# EAGLE board io_top (EAGLE 9.6.2)
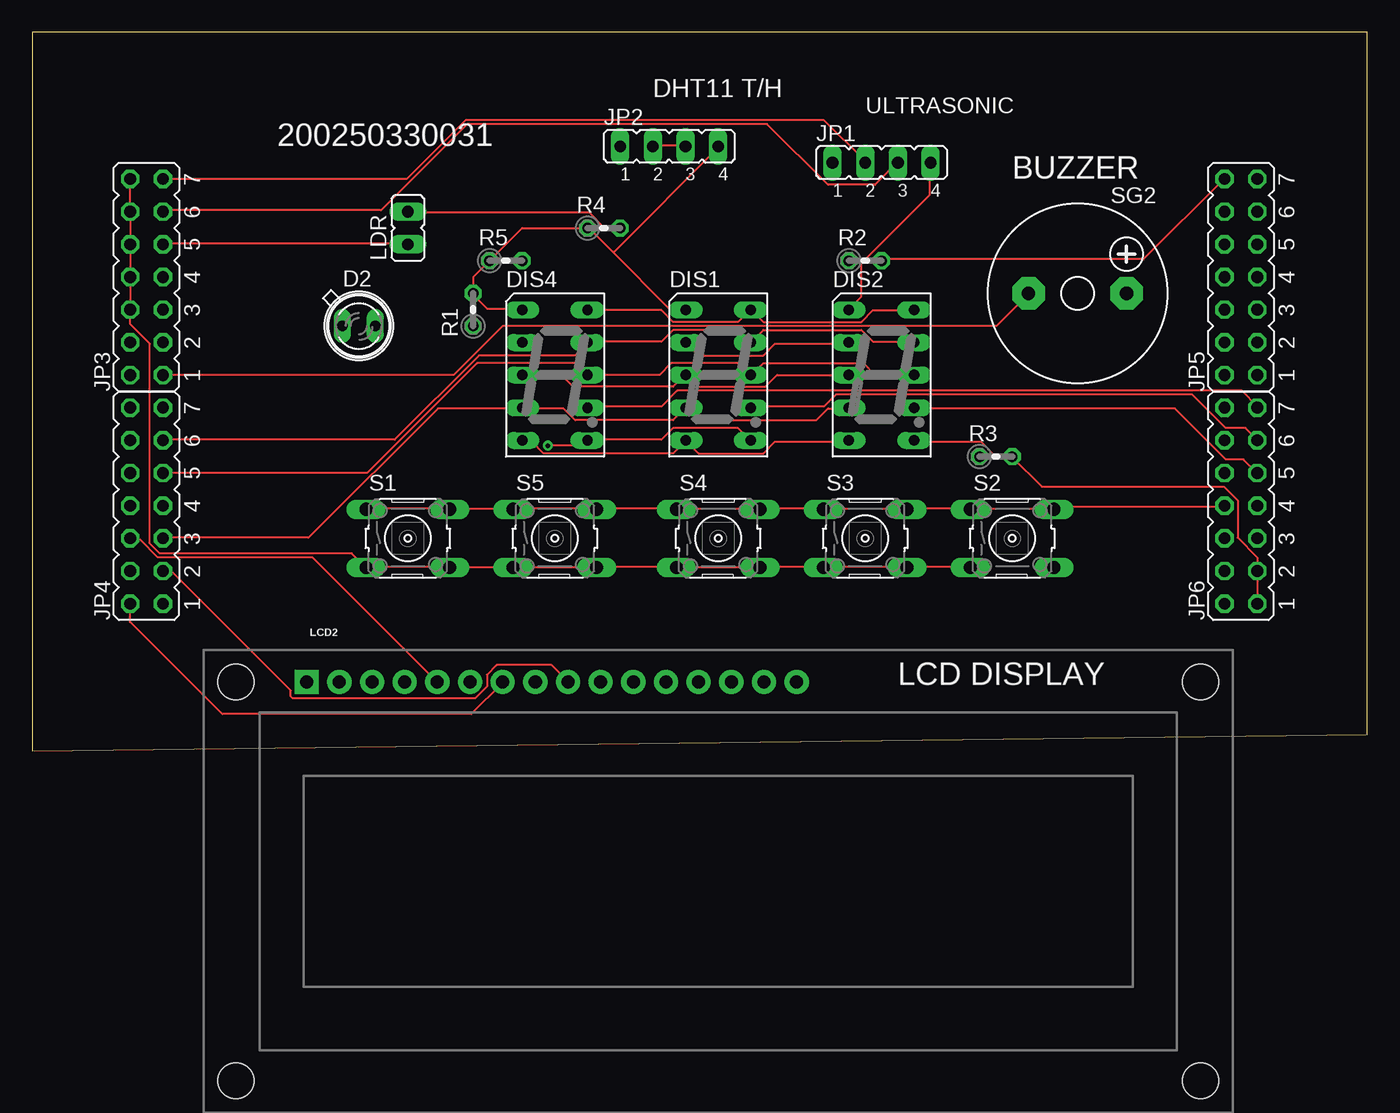
[diagram p0: board, top side]
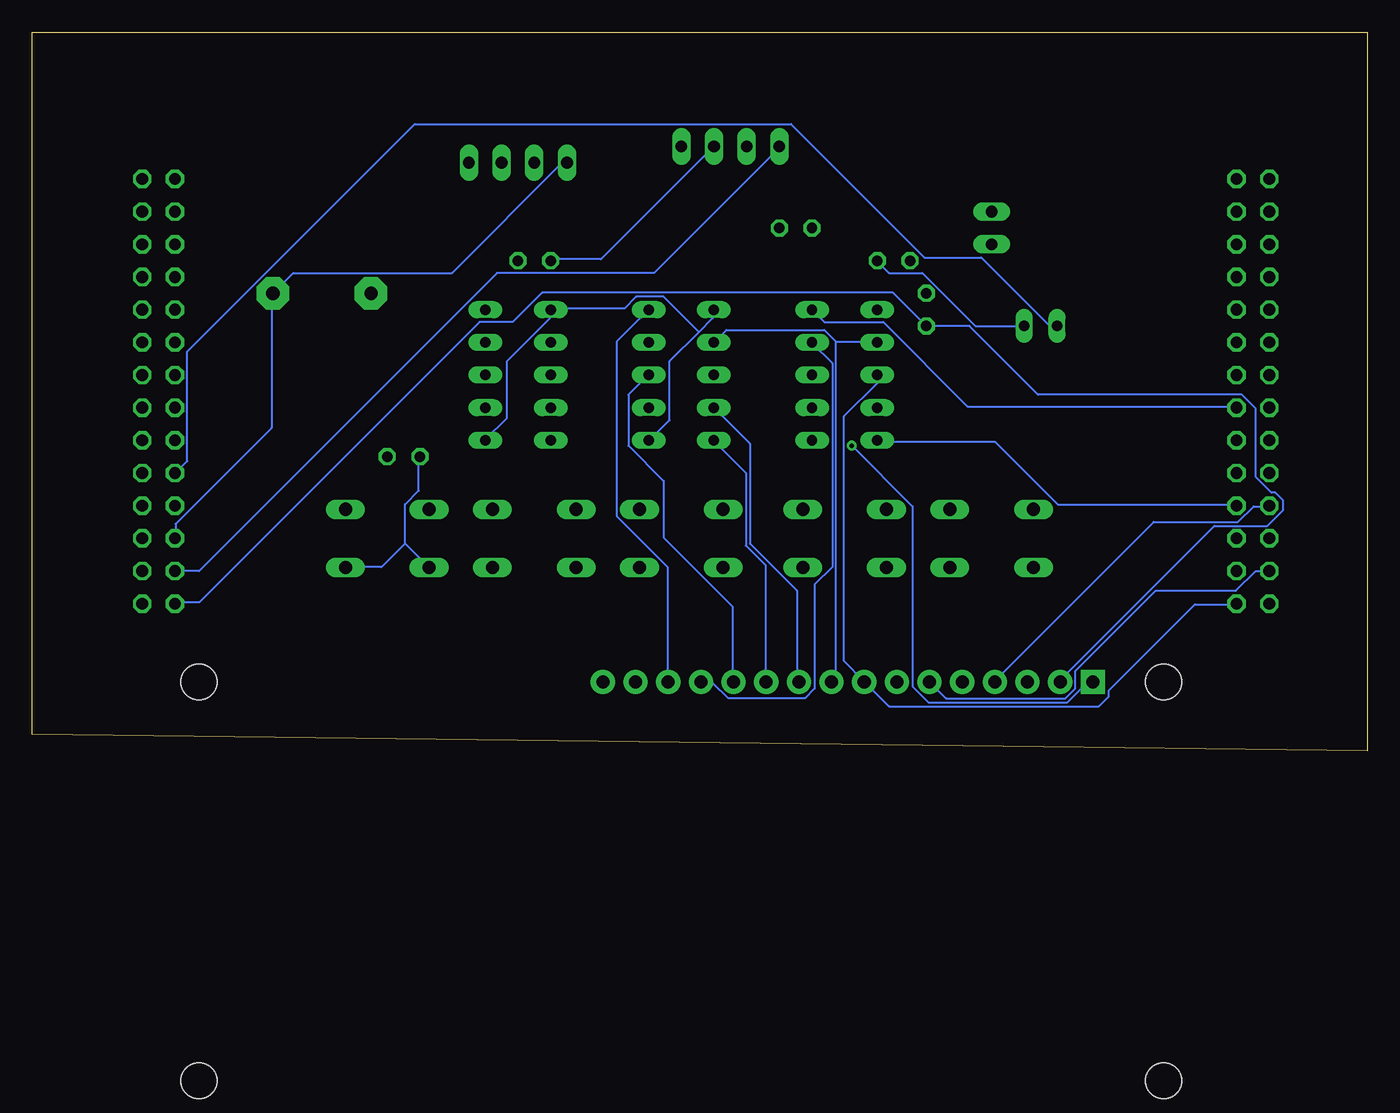
[diagram p1: board, bottom side, seen from below]

Size 103.81 x 55.87 mm. Coordinates in mm from the lower left corner, seen from the top.
Outline: 0,0 103.81,1.27 103.81,55.87 0,55.87 0,0
Copper layers (1*16): Top 0.035mm / dielectric 1.5mm / Bottom 0.035mm
Design rules "default": minimum track width 6mil, minimum drill 0.35mm, track to track 6mil, track to pad 6mil, pad to pad 6mil, via to via 6mil, smd to smd 6mil, copper to edge 40mil, drill to drill 6mil, minimum pad ring 10mil, minimum via ring 8mil, stop-mask expansion 4mil, vias tented up to drill 0mil, thermal gap 10mil

## Footprints (pad centres in the part's own frame; a part is rotated, then mirrored left to right if it is on the bottom)
SFH482 = drill 0.813 long: A -1.27,0; K 1.27,0
HDSP-A = drill 0.813 long: 1 -2.54,5.08; 2 -2.54,2.54; 3 -2.54,0; 4 -2.54,-2.54; 5 -2.54,-5.08; 6 2.54,-5.08; 7 2.54,-2.54; 8 2.54,0; 9 2.54,2.54; 10 2.54,5.08
JP4 = drill 0.914 long: 1 -3.81,0; 2 -1.27,0; 3 1.27,0; 4 3.81,0
JP7Q = drill 0.914 octagon: 1 -7.62,-1.27; 2 -7.62,1.27; 3 -5.08,-1.27; 4 -5.08,1.27; 5 -2.54,-1.27; 6 -2.54,1.27; 7 0,-1.27; 8 0,1.27; 9 2.54,-1.27; 10 2.54,1.27; 11 5.08,-1.27; 12 5.08,1.27; 13 7.62,-1.27; 14 7.62,1.27
LCD-16X2_NOSILK = drill 1.016 pad 1.88 square: 1 -32,15.5 | drill 1.016 pad 1.88: 2 -29.46,15.5; 3 -26.92,15.5; 4 -24.38,15.5; 5 -21.84,15.5; 6 -19.3,15.5; 7 -16.76,15.5; 8 -14.22,15.5; 9 -11.68,15.5; 10 -9.14,15.5; 11 -6.6,15.5; 12 -4.06,15.5; 13 -1.52,15.5; 14 1.02,15.5; 15 3.56,15.5; 16 6.1,15.5 | hole 2.8: -37.5,15.5; -37.5,-15.5; 37.5,15.5; 37.5,-15.5
JP1 = drill 0.914 long: 1 0,-1.27; 2 0,1.27
0204V = drill 0.813 octagon: 1 -1.27,0; 2 1.27,0
B3F-10XX = drill 1.016 long: 1 -3.251,2.261; 2 3.251,2.261; 3 -3.251,-2.261; 4 3.251,-2.261
F/CM12P = drill 1.016 pad 2.54 octagon: + 3.81,0; - -3.81,0

## Placement (x,y rotation side)
D2  SFH482  [SFH482]  25.4,33.02 0 top
DIS1  HD-A103  [HDSP-A]  53.34,29.21 0 top
DIS2  HD-A103  [HDSP-A]  66.04,29.21 0 top
DIS4  HD-A103  [HDSP-A]  40.64,29.21 0 top
JP1  [JP4]  66.04,45.72 0 top
JP2  [JP4]  49.53,46.99 0 top
JP3  [JP7Q]  8.89,36.83 90 top
JP4  [JP7Q]  8.89,19.05 90 top
JP5  [JP7Q]  93.98,36.83 90 top
JP6  [JP7Q]  93.98,19.05 90 top
LCD2  LCD-16X2NOSILK  [LCD-16X2_NOSILK]  53.34,-10.16 0 top
LDR  [JP1]  29.21,40.64 0 top
R1  [0204V]  34.29,34.29 90 top
R2  [0204V]  64.77,38.1 0 top
R3  [0204V]  74.93,22.86 0 top
R4  [0204V]  44.45,40.64 0 top
R5  [0204V]  36.83,38.1 0 top
S1  [B3F-10XX]  29.21,16.51 0 top
S2  [B3F-10XX]  76.2,16.51 0 top
S3  [B3F-10XX]  64.77,16.51 0 top
S4  [B3F-10XX]  53.34,16.51 0 top
S5  [B3F-10XX]  40.64,16.51 0 top
SG2  F/CM12P  [F/CM12P]  81.28,35.56 0 top

## Library data of the parts
D2 = led
DIS1 DIS2 DIS4 = display-hp; OC_FARNELL: unknown; OC_NEWARK: unknown
JP1-JP6 LDR = jumper
LCD2 = SparkFun-Displays; SF_ID: LCD-00255
R1-R5 = rcl; SPICEPREFIX: R
S1-S5 = switch-omron; MPN: B3F-1000; OC_FARNELL: 176432; OC_NEWARK: 36M3542
SG2 = buzzer; OC_FARNELL: unknown; OC_NEWARK: unknown

## Nets
5V: JP1.1 JP6.6 SG2.+
A: LCD2.15
GND: DIS1.1 DIS1.6 DIS2.1 DIS2.6 DIS4.1 DIS4.6 JP1.4 JP2.4 JP6.1 JP6.3 LCD2.1 R1.2 R3.2 R4.1 R5.1
K: LCD2.16
N$1: JP3.1 SG2.-
N$2: JP2.2 JP2.3 R2.1
N$3: DIS1.3 DIS2.3 DIS4.3 JP4.1 LCD2.8
N$4: DIS1.2 DIS2.2 DIS4.2 JP4.3 LCD2.9
N$5: DIS1.4 DIS2.4 DIS4.4 JP4.5 LCD2.10
N$6: DIS1.5 DIS2.5 DIS4.5 JP4.7 LCD2.11
N$7: DIS1.8 DIS2.8 DIS4.8 JP4.9 LCD2.12
N$8: DIS1.9 DIS2.9 DIS4.9 JP4.11 LCD2.13
N$9: DIS1.10 DIS2.10 DIS4.10 JP4.13 LCD2.14
N$10: JP4.2 LCD2.7
N$11: JP6.2 LCD2.2 R1.1
N$12: JP1.3 JP3.11
N$13: JP4.4 LCD2.6
N$14: JP4.6 LCD2.5
N$15: JP4.8 LCD2.4
N$16: JP3.6 JP3.8 JP3.10 JP3.12 JP3.14 R3.1 S1.3 S1.4 S2.3 S2.4 S3.3 S3.4 S4.3 S4.4 S5.3 S5.4
N$17: JP1.2 JP3.13
N$18: JP5.14 R2.2
N$19: JP3.9 LDR.1
N$20: LDR.2 R4.2
N$21: JP2.1 JP6.4
N$22: JP6.8 S1.1 S1.2 S2.1 S2.2 S3.1 S3.2 S4.1 S4.2 S5.1 S5.2
N$23: D2.K R5.2
N$24: D2.A JP6.10
N$25: DIS4.7 JP6.13
N$26: DIS1.7 JP6.11
N$27: DIS2.7 JP6.9

## Tracks (layer width: path | path; a pad name or v marks a point on that pad's centre or on a via)
5V
  Bottom 0.152: JP6.6 92.66,16.56 92.66,17.63 85.19,25.09 85.19,35.46 SG2.+ 83.52,37.13 71.17,37.13 62.64,45.67 62.33,45.67 JP1.1
GND  (via drill 0.35)
  Top 0.152: JP6.1 JP6.3 95.25,15.04 93.73,16.56 93.73,19.46 92.66,20.52 78.49,20.52 76.2,22.81 R3.2 76.2,22.96 74.83,22.96 73.76,24.03 68.58,24.03 DIS2.6 | JP1.4 69.8,45.67 69.8,43.23 64.47,37.9 64.47,35.31 63.55,34.39 DIS2.1 | DIS4.1 38.1,34.39 35.36,34.39 34.29,35.46 R1.2 34.29,36.83 R5.1 38.1,40.64 R4.1 43.28,40.64 45.11,38.81 | 45.11,38.81 49.53,34.39 50.75,34.39 DIS1.1 | 45.11,38.81 45.26,38.81 53.34,46.89 JP2.4 | DIS1.6 55.78,24.18 54.86,25.09 49.84,25.09 48.92,24.18 43.28,24.18 DIS4.6 43.13,24.03 42.82,23.72 v40.08,23.72
  Bottom 0.152: DIS2.6 68.58,24.18 66.9,25.86 66.9,30.28 63.55,33.63 63.55,34.24 DIS2.1 63.4,34.39 57.76,34.39 56.84,35.31 54.71,35.31 51.97,32.56 | v40.08,23.72 35.36,19 35.36,4.98 34.14,3.76 23.32,3.76 21.79,5.28 21.49,5.28 LCD2.1 | 51.97,32.56 54.25,30.28 54.25,25.7 55.78,24.18 DIS1.6 | 51.97,32.56 50.9,33.63 50.9,34.24 DIS1.1
N$1
  Top 0.152: JP3.1 32.77,29.21 36.58,33.02 74.98,33.02 77.42,35.46 SG2.-
N$2
  Top 0.152: JP2.2 48.31,47.04 50.75,47.04 JP2.3
  Bottom 0.152: JP2.3 59.59,38.2 63.4,38.2 R2.1
N$3
  Top 0.152: DIS4.3 41.15,29.21 42.06,28.3 49.84,28.3 50.75,29.21 DIS1.3 50.9,29.21 51.82,28.3 57,28.3 57.91,29.21 DIS2.3
  Bottom 0.152: JP4.1 10.21,11.38 13.41,11.38 20.12,4.67 20.12,4.22 20.88,3.45 37.19,3.45 39.01,5.28 LCD2.8 39.17,5.44 40.69,6.96 40.69,26.01 38.1,28.6 DIS4.3
N$4
  Top 0.152: DIS1.2 51.82,30.73 56.84,30.73 57.76,31.65 63.4,31.65 DIS2.2 | JP4.3 10.82,13.97 20.12,4.67 20.12,4.22 20.27,4.06 34.44,4.06 35.36,4.98 35.36,5.89 36.12,6.66 40.39,6.66 41.6,5.44 LCD2.9
  Bottom 0.152: 41.3,31.8 38.1,31.8 DIS4.2 | 41.3,31.8 42.22,32.71 49.84,32.71 DIS1.2 | 41.3,31.8 41.3,5.74 41.6,5.44 LCD2.9
N$5
  Top 0.152: 38.1,26.62 41.3,26.62 42.22,25.7 49.84,25.7 DIS1.4 50.9,26.62 51.82,25.7 60.96,25.7 61.87,26.62 63.4,26.62 DIS2.4 | 38.1,26.62 31.55,26.62 21.49,16.56 10.21,16.56 JP4.5 | 38.1,26.62 DIS4.4
  Bottom 0.152: DIS1.4 48.01,23.88 48.01,16.1 44.35,12.45 44.35,5.44 LCD2.10
N$6
  Top 0.152: DIS4.5 38.1,24.03 38.86,24.03 39.78,23.11 49.84,23.11 50.75,24.03 DIS1.5 51.82,23.11 56.84,23.11 57.76,24.03 63.4,24.03 DIS2.5
  Bottom 0.152: JP4.7 10.21,19.15 24.08,19.15 28.96,24.03 38.1,24.03 DIS4.5 | LCD2.11 46.79,5.44 46.79,14.43 48.31,15.95 48.31,21.59 50.75,24.03 DIS1.5
N$7
  Top 0.152: DIS2.8 65.53,29.21 64.62,30.12 56.84,30.12 55.93,29.21 DIS1.8 55.78,29.21 54.86,30.12 49.68,30.12 48.77,29.21 DIS4.8 43.13,29.21 42.22,30.12 34.59,30.12 26.06,21.59 JP4.9
  Bottom 0.152: LCD2.12 49.38,5.44 49.38,11.23 54.71,16.56 54.71,20.98 57.45,23.72 57.45,27.69 55.93,29.21 DIS1.8
N$8
  Top 0.152: DIS2.9 68.58,31.8 65.38,31.8 64.47,32.71 56.84,32.71 DIS1.9 55.78,31.8 54.86,32.71 49.84,32.71 48.92,31.8 43.28,31.8 DIS4.9 43.13,31.65 42.22,30.73 34.75,30.73 28.19,24.18 10.21,24.18 JP4.11
  Bottom 0.152: LCD2.13 51.82,5.28 50.9,5.28 49.68,4.06 43.74,4.06 42.98,4.83 42.98,12.9 41.6,14.27 41.6,30.12 43.13,31.65 DIS4.9
N$9
  Top 0.152: DIS4.10 43.28,34.24 48.92,34.24 49.84,33.33 54.86,33.33 55.78,34.24 DIS1.10 56.84,33.33 64.47,33.33 65.38,34.24 68.58,34.24 DIS2.10
  Bottom 0.152: DIS4.10 42.22,33.33 37.64,33.33 31.09,26.77 10.21,26.77 JP4.13 | DIS1.10 58.37,31.8 58.37,18.24 54.41,14.27 54.41,5.44 LCD2.14
N$10
  Top 0.152: JP4.2 7.62,10.01 14.78,2.84 34.14,2.84 36.58,5.28 LCD2.7
N$11
  Bottom 0.152: LCD2.2 23.93,5.44 11.89,17.48 7.77,17.48 6.55,18.69 6.55,19.46 7.16,20.07 7.47,20.07 8.69,21.28 8.69,26.62 9.75,27.69 25.6,27.69 30.94,33.02 R1.1 36.88,35.61 64.16,35.61 66.45,33.33 69.04,33.33 90.83,11.53 92.66,11.53 JP6.2
N$12
  Top 0.152: JP3.11 10.21,42.01 27.13,42.01 33.83,48.72 57.15,48.72 61.87,43.99 65.53,43.99 67.21,45.67 JP1.3
N$13
  Bottom 0.152: JP4.4 8.69,13.97 10.21,12.45 16.46,12.45 22.71,6.2 22.71,4.83 23.47,4.06 32.77,4.06 33.98,5.28 LCD2.6
N$14
  Top 0.152: JP4.6 7.62,16.41 8.38,16.41 9.75,15.04 21.79,15.04 31.39,5.44 LCD2.5
N$15
  Bottom 0.152: JP4.8 7.62,19 8.84,19 10.06,17.78 16.61,17.78 28.96,5.44 LCD2.4
N$16
  Top 0.152: 43.89,14.27 49.99,14.27 S4.3 50.14,14.27 56.54,14.27 S4.4 56.69,14.27 61.42,14.27 S3.3 61.57,14.27 67.97,14.27 S3.4 68.12,14.27 72.85,14.27 S2.3 | JP3.14 JP3.12 JP3.10 JP3.8 JP3.6 7.62,33.17 9.14,31.65 9.14,16.1 9.91,15.34 24.84,15.34 25.91,14.27 S1.3 26.06,14.27 32.46,14.27 | 32.46,14.27 37.34,14.27 S5.3 37.49,14.27 43.89,14.27 | 32.46,14.27 S1.4 | 43.89,14.27 S5.4
  Bottom 0.152: 74.83,16.1 74.83,19.15 73.76,20.22 73.76,22.81 R3.1 | 74.83,16.1 73,14.27 S2.3 | 74.83,16.1 76.66,14.27 79.4,14.27 S2.4
N$17
  Top 0.152: JP3.13 29.11,44.45 33.68,49.02 61.57,49.02 64.77,45.82 JP1.2
N$18
  Top 0.152: R2.2 66.14,38.2 86.41,38.2 92.66,44.45 JP5.14
N$19
  Top 0.152: JP3.9 10.21,39.42 29.11,39.42 LDR.1
N$20
  Top 0.152: R4.2 44.5,40.64 43.28,41.86 29.26,41.86 LDR.2
N$21
  Bottom 0.152: JP6.4 90.83,13.97 67.67,37.13 55.47,37.13 45.72,46.89 JP2.1
N$22
  Top 0.152: JP6.8 92.66,19 79.7,19 79.55,18.85 S2.2 79.4,18.85 73,18.85 S2.1 72.85,18.85 68.12,18.85 S3.2 67.97,18.85 61.57,18.85 S3.1 61.42,18.85 56.69,18.85 S4.2 56.54,18.85 50.14,18.85 S4.1 49.99,18.85 43.89,18.85 | 32.46,18.85 26.06,18.85 S1.1 | 32.46,18.85 37.34,18.85 S5.1 37.49,18.85 43.89,18.85 | 32.46,18.85 S1.2 | 43.89,18.85 S5.2
N$23
  Bottom 0.152: D2.K 30.48,33.02 34.59,37.13 37.19,37.13 38.1,38.05 R5.2
N$24
  Bottom 0.152: D2.A 24.69,33.02 30.02,38.35 34.44,38.35 44.81,48.72 74.07,48.72 91.75,31.04 91.75,22.5 92.66,21.59 JP6.10
N$25
  Top 0.152: DIS4.7 43.28,26.77 48.92,26.77 50.14,27.99 94.03,27.99 95.25,26.77 JP6.13
N$26
  Top 0.152: DIS1.7 55.93,26.77 61.57,26.77 62.48,27.69 90.22,27.69 92.81,25.09 94.34,25.09 95.25,24.18 JP6.11
N$27
  Top 0.152: JP6.9 94.18,22.66 92.81,22.66 88.85,26.62 68.58,26.62 DIS2.7

## Text on the board
tNames: DHT11 T/H | ULTRASONIC | 200250330031 | BUZZER | LCD DISPLAY